# Altium PCB 二合一.pcbdoc
Units mm, origin at the board's own origin, x right, y up, seen from the top; angles counter-clockwise.
Board outline 50.2 x 14.2 mm, 2 copper layers (Top Layer, Bottom Layer); 49 components, 32 nets, 137 pads, 56 vias.
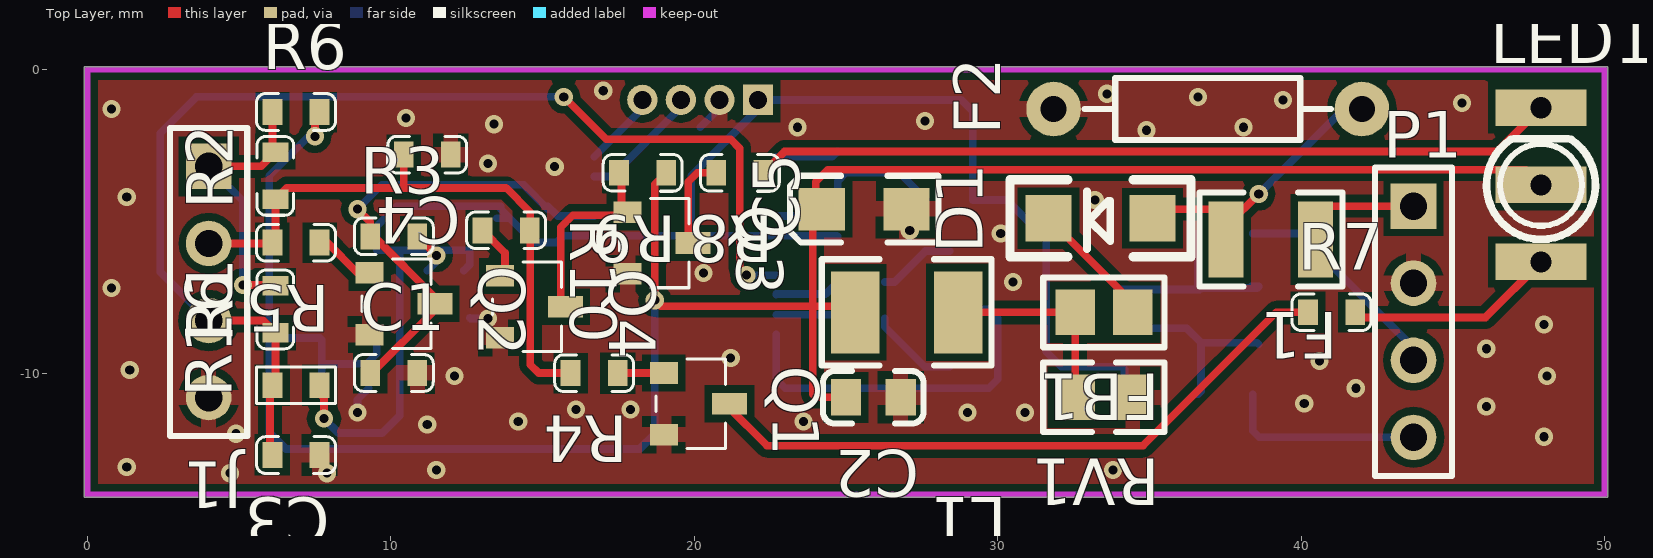
[diagram p0: Top Layer view]
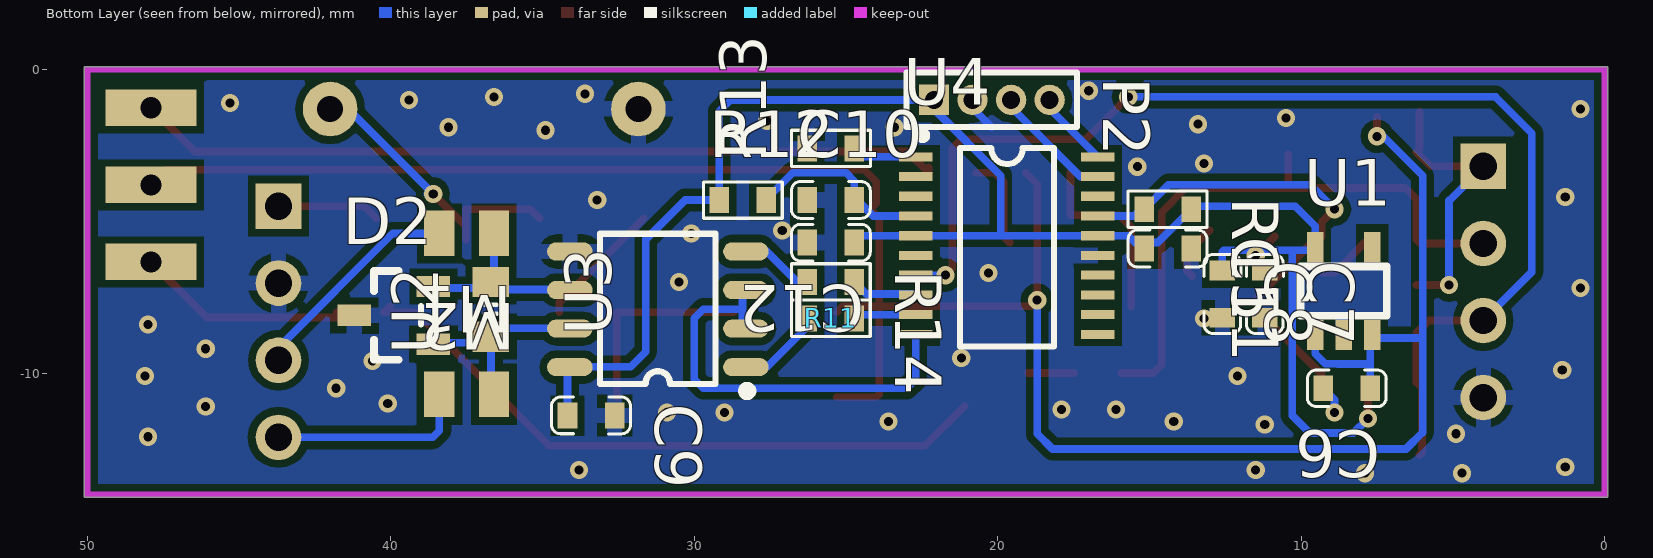
[diagram p1: Bottom Layer view, seen from below]

## Layer stack, top to bottom
Top Solder: solder mask 0.0102, Solder Resist, Dk 3.5
Top Layer: signal copper 0.0356
Dielectric1: dielectric 0.32, FR-4, Dk 4.8
Bottom Layer: signal copper 0.0356
Bottom Solder: solder mask 0.0102, Solder Resist, Dk 3.5

## Board outline
-0.1,-14.1 50.1,-14.1 50.1,0.1 -0.1,0.1

## Design rules (kind name [scope] priority, off if disabled: settings)
Clearance [All] p1: gap=0.25 ignorepadtopadclearanceinfootprint=FALSE except(0: Arc-Hole Track-Hole SMDPad-Hole THPad-Hole Via-Hole Fill-Hole Poly-Hole Region-Hole Text-Hole)
HoleSize [All] p1: absolutevalues=TRUE maxlimit=25.4 minlimit=0.025 maxpercent=80.000 minpercent=20.000
PlaneClearance [All] p1: clearance=0.7
PlaneConnect [All] p1: planeconnectstyle=Relief reliefexpansion=0.508 reliefentries=4 reliefconductorwidth=0.508 reliefairgap=0.381
PolygonConnect PolygonConnect_1 [IsVia] p1: connectstyle=Direct reliefconductorwidth=0.254 reliefentries=4 polygonreliefangle="90 Angle" airgapwidth=0.254
PolygonConnect [All] p2: connectstyle=Relief reliefconductorwidth=0.508 reliefentries=4 polygonreliefangle="90 Angle" airgapwidth=0.254
RoutingLayers [All] p1: top layer_v5=FALSE bottom layer_v5=FALSE
RoutingVias [All] p1: holewidth=0.711 width=1.016 viastyle="Through Hole" minholewidth=0.381 minwidth=0.508 maxholewidth=0.762 maxwidth=1.27
SolderMaskExpansion [All] p1: expansion=0.102
Width [All] p1: maxlimit=1.524 minlimit=0.127 preferedwidth=0.635
26 further rules are at their usual default settings.

## Components (designator, comment, footprint, x,y, rotation, side; value= is the part's Value field where it differs from the comment)
C1 "Cap Chip 0603" 0603C 10.1,-10 r0 top
C2 "1uF" 0805C 25.9,-10.8 r180 top
C3 "Cap Chip 0603" 0603C 6.877,-12.7 r180 top
C4 "Cap Chip 0603" 0603C 11.2,-2.8 r180 top
C5 "10uF/16V" A3216 25.6,-4.6 r180 top
C6 "104" 0603C 8.5,-10.5 r0 bottom
C7 "1uF" 0603C 11.2,-7.4 r270 bottom
C8 "104" 0603C 12.6,-7.4 r270 bottom
C9 "104" 0603C 33.4,-11.4 r180 bottom
C10 "Cap" 0603C 25.5,-4.3 r180 bottom
C11 "104" 0603C 14.4,-5.9 r180 bottom
C12 "104" 0603C 25.5,-5.7 r0 bottom
D1 "1N4148" 1N4148 35.1,-4.9 r180 top
D2 "PESD12VL2" SOT23 39.9,-8.1 r180 bottom
F1 "Luhai:SMD1210-050" 1210R 39,-5.6 r180 top
F2 "DSP-140N" DSP 42,-1.3 r180 top
FB1 "FCM2012-500T" FB 33.5,-8 r180 top
J1 "霍尔HAL730" HDR1X4 4,-3.19 r270 top locked
L1 "220uH/17ohm" 220uH/17ohm 27,-8 r180 top
LED1 "LED-3-DOUBLE" LED-R3-H5-DOUBLE 47.9,-3.8 r90 top
M1 "MCB0805" 0805F 37.5,-5.4 r0 bottom
M2 "MCB0805" 0805F 37.5,-10.7 r0 bottom
P1 "485通讯" HDR1X4 43.7,-4.5 r270 top
P2 "SWD" MHDR1X4 22.1,-1 r180 bottom
Q1 "MMBT3904" MMBT3904 19,-10 r270 top
Q2 "MMBT3904" MMBT3904 9.3,-6.7 r270 top
Q3 "MMBT3904" MMBT3904 17.8,-4.7 r270 top
Q4 "MMBT3904" MMBT3904 13.6,-6.8 r270 top
R1 "Resistor Chip 0603" 0603C 6.2,-7.9 r90 top
R2 "Resistor Chip 0603" 0603C 6.2,-3.5 r90 top
R3 "Resistor Chip 0603" 0603C 10.1,-5.5 r0 top
R4 "Resistor Chip 0603" 0603C 16.7,-10 r180 top
R5 "Resistor Chip 0603" 0603C 6.877,-5.7 r180 top
R6 "Resistor Chip 0603" 0603C 6.879,-1.4 r0 top
R7 "Resistor Chip 0603" 0603C 41,-8 r0 top
R8 "Resistor Chip 0603" 0603C 21.5,-3.4 r180 top
R9 "Resistor Chip 0603" 0603C 18.3,-3.4 r180 top
R10 "Resistor Chip 0603" 0603C 13.8,-5.3 r0 top
R11 "120" 0603R 25.5,-8.2 r180 bottom
R12 "100K" 0603R 28.4,-4.3 r180 bottom
R13 "10k" 0603R 25.5,-2.6 r0 bottom
R14 "120" 0603R 25.5,-7 r180 bottom
R15 "10K" 0603R 14.4,-4.6 r180 bottom
R16 "10K" 0603R 6.877,-10.4 r180 top
RV1 "V30ML" RV 33.5,-10.8 r180 top
U1 "LP2980AIM5-3.3" SOT-23-5 8.6,-7.3 r180 bottom
U2 "V30ML" 0805C-E 36.7,-7.9 r90 bottom
U3 "RS485" SOP8 31.2,-7.9 r90 bottom
U4 "STM32L031F4/6" TSSOP20 19.7,-5.8 r180 bottom

## Footprints (in the part's own frame and the unit in brackets; to place one, negate y for a bottom-side part, rotate by r counter-clockwise, add the part's x,y. Pads: shape width x height; smd on the part's side, far side on the other; paste and mask are expansions set on the pad)
1N4148 [mil]
  rect 60x60 smd: 1(0,0) 2(135,0)
  silkscreen extent -50,-50 185,50
220uH/17ohm [mm]
  rect 1.6x2.7 smd: 1(-1.7,0) 2(1.7,0)
  silkscreen extent -2.8,-1.75 2.8,1.75
0603C [mm]
  rect 0.65x0.85 smd: 1(-0.776,0) 2(0.776,0)
  silkscreen extent -1.3,-0.6 1.3,0.61, body extent -0.83,-0.39 0.77,0.41, height 0.3
0603R [mm] "Chip Inductor, Body 0.6x0.3mm, IPC High Density"
  rect 0.65x0.85 smd: 1(-0.776,0) 2(0.776,0)
  silkscreen extent -1.3,-0.6 1.3,0.6, body extent -0.8,-0.39 0.8,0.41, height 0.3
0805C [mm]
  rect 1x1.2 smd: 1(-0.9,0) 2(0.9,0)
  silkscreen extent -1.66,-0.87 1.66,0.87, body extent -0.96,-0.63 1.04,0.63, height 0.77
0805C-E [mm]
  rect 1x1.2 smd: 1(-0.9,0) 2(0.9,0)
  silkscreen extent -0.15,-0.2 0.15,0.2, body extent -0.96,-0.63 1.04,0.63, height 0.77
0805F [mm]
  rect 1x1.5 smd: 1(-0.9,0) 2(0.9,0)
  body extent -1.1,-0.75 1.11,0.75, height 1.24
1210R [mm]
  rect 1.16x2.5 smd: 1(-1.475,0) 2(1.475,0)
  silkscreen extent -2.35,-1.55 2.36,1.55, body extent -1.62,-1.22 1.58,1.28, height 0.55
A3216 [mil]
  rect 60x55.12 smd: 1(55,0) 2(-55,0)
  silkscreen extent -96,-43 96,43, body extent -67,-33 67,33, height 67
DSP [mm]
  round 1.8 hole 0.85: 1(0,0) 2(10.16,0)
  silkscreen extent 1.02,-1.02 9.14,1.02
FB [mm]
  rect 1.3x1.5 smd: 1(-0.95,0) 2(0.95,0)
  silkscreen extent -2,-1.15 2,1.15
HDR1X4 [mm] "Connector; Header; 4 Position"
  rect 1.5x1.5 hole 0.9: 1(0,0)
  round 1.5 hole 0.9: 2(2.54,0) 3(5.08,0) 4(7.62,0)
  silkscreen extent -1.27,-1.27 8.89,1.27
LED-R3-H5-DOUBLE [mm]
  rect 1.2x3 hole 0.7: 1(0,0) 2(-2.54,0) 3(2.54,0)
  silkscreen extent -1.8,-1.79 1.52,1.79
MHDR1X4 [mm] "Connector; Header; 4 Position"
  rect 1x1 hole 0.6: 1(0,0)
  round 1 hole 0.6: 2(1.27,0) 3(2.54,0) 4(3.81,0)
  silkscreen extent -0.9,-0.9 4.71,0.9
MMBT3904 [mil]
  rect 28x36 smd: 1(0,0) 2(80,0)
  rect 28x45 smd: 3(40,85)
  silkscreen extent -18,-10 98,80
RV [mm]
  rect 1.3x1.5 smd: 1(-0.95,0) 2(0.95,0)
  silkscreen extent -2,-1.15 2,1.15
SOP8 [mm] "1.27mm 150mil"
  oval 0.6x1.5 smd: 1(-1.905,-2.9) 2(-0.635,-2.9) 3(0.635,-2.9) 4(1.905,-2.9) 5(1.905,2.9) 6(0.635,2.9) 7(-0.635,2.9) 8(-1.905,2.9)
  silkscreen extent -2.84,-3.09 2.49,1.91, body extent -2.44,-3 2.46,3, height 1.55
SOT23 [mm]
  rect 1.1x0.7 smd: 1(1.301,-0.95) 2(1.301,0.95) 3(-1.301,0)
  silkscreen extent -0.65,-1.46 0.9,1.46, body extent -1.5,-1.5 1.5,1.5, height 1.3
SOT-23-5 [mm]
  rect 0.551x1 smd: 1(-0.94,-1.448) 2(0,-1.448) 3(0.94,-1.448) 4(0.94,1.448) 5(-0.94,1.448)
  silkscreen extent -1.42,-0.81 1.42,0.81
TSSOP20 [mm]
  rect 1.1x0.3 smd: 1(-3,2.925) 2(-3,2.275) 3(-3,1.625) 4(-3,0.975) 5(-3,0.325) 6(-3,-0.325) 7(-3,-0.975) 8(-3,-1.625) 9(-3,-2.275) 10(-3,-2.925) 11(3,-2.925) 12(3,-2.275) 13(3,-1.625) 14(3,-0.975) 15(3,-0.325) 16(3,0.325) 17(3,0.975) 18(3,1.625) 19(3,2.275) 20(3,2.925)
  silkscreen extent -2.9,-3.33 1.55,3.75, body extent -3.14,-3.32 3.14,3.17, height 1.09

## Part data
C1 C3 C4: "Polarized Capacitor (Radial)"
C2: library part "Cap Chip 0805", "Polarized Capacitor (Radial)"
C5: library part CAPACITOR, "Capacitor"
C6 C7 C8 C11 C12: library part CAP, "Capacitor"
C9: library part Cap, "Capacitor"
C10: "Capacitor"
D2: library part TVS
F1: library part "Fuse 1", "Fuse"
J1 P2: library part "Header 4", "Header, 4-Pin"
LED1: library part DOUB-LED
M1 M2: library part "MAGNETIC BEAD", "magnetic bead"
P1: library part "Header 4H", "Header, 4-Pin, Right Angle"
R1 R2 R3 R4 R5 R6 R7 R8 R9 R10: "Resistor"
R11 R14: library part RES1
R12 R13 R15 R16: library part Res1, "Resistor"

## Via types
v1: diameter 0.6, hole 0.3, Top Layer to Bottom Layer, tented both sides, 56 vias

## Nets (pads, with @x,y where several pads share a name; then routed paths per layer and width w, separated by ;. In a path a pad name is that pad's centre, name@x,y a point inside that pad or via, vN(x,y) a via of type N, cw(c..) or ccw(c..) an arc to the next point about the centre after c; other vN are vias at no path point)
A: M1.2 P1.3 | length 7.3
  Bottom Layer w0.254: M1.2 39.934,-5.4 43.7,-9.166 P1.3
A1: D2.2 M1.1 U2.2 U3.6 | length 6.7
  Bottom Layer w0.254: U3.6@33.998,-7.251 36.649,-7.251 U2.2@36.7,-7.2 ; M1.1 36.6,-7.1 U2.2@36.7,-7.2 ; D2.2@38.35,-7.15 D2.2 38.549,-7.2 U2.2@36.7,-7.2
B: M2.2 P1.4 | length 6.6
  Bottom Layer w0.254: M2.2 38.4,-11.9 38.62,-12.12 P1.4
B1: D2.1 M2.1 U2.1 U3.7 | length 6.6
  Bottom Layer w0.254: U3.7@33.998,-8.521 36.221,-8.521 U2.1@36.7,-9 ; M2.1 36.7,-10.6 U2.1@36.7,-9 ; D2.1 38.549,-9 U2.1@36.7,-9
DC3.3V: C7.1 C8.1 C9.1 C11.1 C12.1 P2.1 R3.2 R12.1 R15.2 R16.1 U1.5 U3.8 U4.5 U4.16 | length 58.5
  Top Layer w0.254: R16.1@7.6,-10.617 7.8,-10.817 v1(7.8,-11.5) ; R3.2 v1(11.5,-6.124)
  Bottom Layer w0.254: v1(7.8,-11.5) 8.277,-11.977 9.723,-11.977 10.3,-11.4 10.3,-5.952 ; 10.098,-5.954 10.1,-5.952 ; C7.1 11.5,-6.324 v1(11.5,-6.124) 11.5,-6.052 v1@11.4,-5.952 ; C8.1@12.4,-6.624 12.6,-6.424 12.6,-6 12.552,-5.952 v1@11.4,-5.952 ; R15.2@13.5,-4.898 R15.2@13.922,-4.898 ; R15.2 R15.2@13.922,-4.898 ; R15.2@13.624,-4.5 10.2,-4.5 9.54,-5.16 9.54,-5.952 10.1,-5.952 ; C12.1@24.724,-5.5 24.699,-5.475 19.9,-5.475 ; U3.8@33.998,-9.791 32.091,-9.791 31.6,-9.3 31.6,-5.6 30.3,-4.3 R12.1 29.176,-1.376 28.8,-1 P2.1 22.1,-1.3 19.9,-3.5 19.9,-5.475 ; U3.8 34.176,-9.881 C9.1 ; 10.1,-5.952 10.3,-5.952 ; 10.3,-5.952 v1@11.4,-5.952 ; R15.2@13.922,-4.898 14.724,-5.7 15.475,-5.7 15.7,-5.475 U4.16 19.9,-5.475
DIR: C1.1 Q2.3 R3.1 R15.1 U4.17 | length 16.1
  Top Layer w0.254: v1(8.9,-4.6) 9.324,-5.024 R3.1 9.446,-5.5 11.459,-7.513 Q2.3 11.459,-7.919 9.378,-10 C1.1
  Bottom Layer w0.254: v1@9,-4.6 v1(8.9,-4.6) 9.702,-3.798 14.374,-3.798 R15.1 ; R15.1@15.176,-4.5 15.501,-4.825 U4.17
GND: C1.2 C2.1 C3.1 C4.1 C5.2 C6.2 C7.2 C8.2 C9.2 C10.1 C11.2 C12.2 D2.3 F2.2 J1.4 P1.2 P2.2 Q1.2 Q2.2 Q3.2 Q4.2 R13.2 RV1.1 U1.2 U3.5 U4.15 | length 2.7
  Bottom Layer w0.254: v1(8.9,-11.3) 8.9,-10.876 C6.2 ; C8.2 12.624,-8.2 v1(13.2,-8.2) ; 20.2,-1.9 20.83,-1.27 P2.2
  other v1: 4.7,-13.3 7.9,-13.3 11.5,-13.2 33.8,-13.2 1.3,-13.1 48,-12.1 4.9,-12 11.2,-11.7 14.2,-11.6 23.6,-11.6 29,-11.3 30.9,-11.3 16.1,-11.2 17.9,-11.2 46.1,-11.1 40.1,-11 41.8,-10.5 12.1,-10.1 48.1,-10.1 1.4,-9.9 40.6,-9.6 21.2,-9.5 46.1,-9.2 48,-8.4 0.8,-7.2 30.5,-7 20.3,-6.7 30.1,-5.4 27.1,-5.3 33.2,-4.3 1.3,-4.2 15.4,-3.2 13.2,-3.1 34.9,-2 23.4,-1.9 38.1,-1.9 13.4,-1.8 27.6,-1.7 10.5,-1.6 0.8,-1.3 45.3,-1.1 39.4,-1 36.6,-0.9 33.6,-0.8 17,-0.7
NetC4_2: C4.2 J1.2 R2.1 R4.2 R5.2 R10.2 | length 20.1
  Top Layer w0.254: J1.2@3.9,-5.476 J1.2@3.924,-5.5 ; J1.2 6.071,-5.73 R5.2 6.2,-5.601 R2.1 6.576,-3.9 10.4,-3.9 ; C4.2 10.424,-3.876 10.4,-3.9 ; R4.2 14.876,-10 14.6,-9.724 14.6,-4.7 13.8,-3.9 10.4,-3.9
NetC10_2: C10.2 R12.2 U4.4 | length 6.3
  Bottom Layer w0.254: U4.4 24.099,-4.825 C10.2@24.724,-4.2 ; C10.2 C10.2@24.724,-4.2 ; R12.2 27.624,-4.268 26.757,-3.402 25.795,-3.402 25.793,-3.4 25.207,-3.4 25.205,-3.402 24.998,-3.402 24.724,-3.676 C10.2@24.724,-4.2
NetD1_1: D1.1 F1.2 F2.1 | length 9.7
  Top Layer w0.254: D1.1 35.4,-4.6 37.525,-4.6 F1.2 ; F1.2@37.6,-5.1 v1(38.6,-4.1)
  Bottom Layer w0.254: v1@38.8,-4.1 v1(38.6,-4.1) 41.4,-1.3 F2.1
NetD1_2: D1.2 FB1.1 | length 4.3
  Top Layer w0.254: D1.2 34.45,-7.679 FB1.1
NetFB1_2: FB1.2 L1.1 RV1.2 | length 6.7
  Top Layer w0.254: L1.1 FB1.2 RV1.2
NetJ1_1: J1.1 R1.2 R2.2 R6.1 | length 9.4
  Top Layer w0.254: J1.1@3.824,-2.6 J1.1@3.9,-2.676 ; J1.1 5.734,-3.19 R2.2 6.102,-2.626 R6.1 ; v1@5,-7.1 R1.2@6.2,-7.1
  Bottom Layer w0.254: J1.1 5.127,-4.317 v1(5.127,-7.1)
NetLED1_2: LED1.2 R7.2 | length 7
  Top Layer w0.254: R7.2 41.776,-8.167 46.073,-8.167 LED1.2
NetLED1_3: LED1.3 R8.1 | length 26.7
  Top Layer w0.254: R8.1@22.276,-3.224 R8.1 22.976,-2.7 46.46,-2.7 LED1.3
NetQ1_1: Q1.1 R4.1 | length 1.5
  Top Layer w0.254: R4.1 Q1.1
NetQ1_3: Q1.3 R7.1 | length 21.8
  Top Layer w0.254: Q1.3@21.088,-11.087 22.4,-12.4 34.783,-12.4 39.183,-8 R7.1 R7.1@40.024,-7.8
NetQ2_1: Q2.1 R5.1 | length 2.1
  Top Layer w0.254: R5.1 7.9,-5.7 8.9,-6.7 Q2.1
NetQ3_1: Q3.1 Q4.3 R9.2 | length 6.2
  Top Layer w0.254: Q4.3@15.6,-7.816 15.6,-5.2 16,-4.8 17.6,-4.8 R9.2@17.6,-3.4
NetQ3_3: Q3.3 R8.2 | length 3.1
  Top Layer w0.254: Q3.3@19.6,-5.7 19.8,-5.5 19.8,-3.7 20.1,-3.4 R8.2
NetQ4_1: Q4.1 R10.1 | length 1.9
  Top Layer w0.254: R10.1 13.762,-6.038 13.762,-6.638 Q4.1
NetR11_1: R11.1 U3.1 | length 3
  Bottom Layer w0.254: R11.1 26.276,-8.476 27.591,-9.791 U3.1@28.41,-9.791
NetR13_1: R13.1 U4.1 | length 2.1
  Bottom Layer w0.254: U4.1 24.549,-2.875 R13.1@24.724,-2.7
NetR14_1: R14.1 U3.4 | length 2.6
  Bottom Layer w0.254: R14.1 26.6,-7 27.619,-5.981 U3.4@28.41,-5.981
SP: C3.2 J1.3 R1.1 R16.2 U4.7 | length 38.9
  Top Layer w0.254: J1.3 5.794,-8.27 R1.1 6.2,-10.301 R16.2 6.023,-10.478 6.023,-12.622 C3.2 ; v1(15.7,-0.9) 17.1,-2.3 21.2,-2.3 21.5,-2.6 21.5,-6.55 v1(21.725,-6.775)
  Bottom Layer w0.254: J1.3 2.4,-6.67 2.4,-2.1 3.6,-0.9 15,-0.9 v1(15.7,-0.9) ; v1(21.725,-6.775) U4.7
SWCLK: P2.4 U4.20 | length 2.5
  Bottom Layer w0.254: U4.20 18.29,-1.285 P2.4
SWDIO: P2.3 U4.19 | length 4.1
  Bottom Layer w0.254: U4.19 17.283,-3.525 19.56,-1.248 P2.3
U2_RXD: R11.2 U4.9 | length 2.1
  Bottom Layer w0.254: U4.9 24.599,-8.075 R11.2
U2_TX_ON: U3.2 U3.3 U4.10 | length 14
  Bottom Layer w0.254: U4.10 22.7,-10.2 23,-10.5 29.7,-10.5 30,-10.2 30,-8.2 29.7,-7.9 28.4,-7.9 ; U3.2@28.41,-8.521 U3.3@28.41,-7.251
U2_TXD: R14.2 U4.8 | length 2.2
  Bottom Layer w0.254: U4.8 22.7,-7.398 24.326,-7.398 R14.2
VCC: C2.2 C5.1 C6.1 L1.2 LED1.1 R6.2 R9.1 U1.1 U1.3 | length 78.6
  Top Layer w0.254: v1(7.5,-2.2) R6.2@7.5,-1.555 ; R9.1 18.7,-3.776 v1(18.7,-7.6) 18.901,-7.801 23.9,-7.801 ; C2.2@25.3,-10.8 24,-10.8 23.9,-10.7 23.9,-7.801 ; L1.2 25.101,-7.801 23.9,-7.801 ; LED1.1 47.397,-3.297 24.4,-3.297 24,-3.697 24,-4.397 C5.1 23.9,-4.903 23.9,-7.801
  Bottom Layer w0.254: 6,-8.848 7.66,-8.848 7.724,-8.912 7.724,-9.7 ; v1(7.5,-2.2) 7.3,-2.2 6,-3.5 6,-11.957 6.547,-12.504 18.196,-12.504 18.7,-12 v1(18.7,-7.6) ; C6.1 7.724,-9.7 ; U1.1 9.54,-9.36 9.202,-9.698 8.795,-9.698 8.793,-9.7 7.724,-9.7
VIN: F1.1 P1.1 | length 3.4
  Top Layer w0.254: F1.1@40.475,-4.9 40.875,-4.5 P1.1
pads on no net: U1.4 U4.2 U4.3 U4.6 U4.11 U4.12 U4.13 U4.14 U4.18

## Polygon pours and split planes (outlines as drawn)
GND on Bottom Layer "Top Layer-No Net" (solid, remove dead copper, pour order 26): -0.6,1.5 -0.6,-14.4 -0.3,-14.7 0,-14.4 50.5,-14.4 50.5,0.5 50.4,0.6 49.5,1.5 -0.6,1.5
GND on Top Layer "Top Layer-No Net" (solid, remove dead copper, pour order 30): -0.2,0.3 -0.2,-14 -0.5,-14.3 -0.4,-14.2 50.4,-14.2 50.4,-0.1 50,0.3 49.9,0.4 -0.2,0.4

## Keep-outs
Keep-Out Layer:
  lines w0.2: 0,-14 50,-14 50,0 0,0 0,-14